# Altium PCB leddriver.PcbDoc
Units mm, origin at the board's own origin, x right, y up, seen from the top; angles counter-clockwise.
Board outline 133.49 x 91.8 mm, 2 copper layers (Top Layer, Bottom Layer), stack 1.58 mm thick; 86 components, 65 nets, 287 pads, 5 vias.
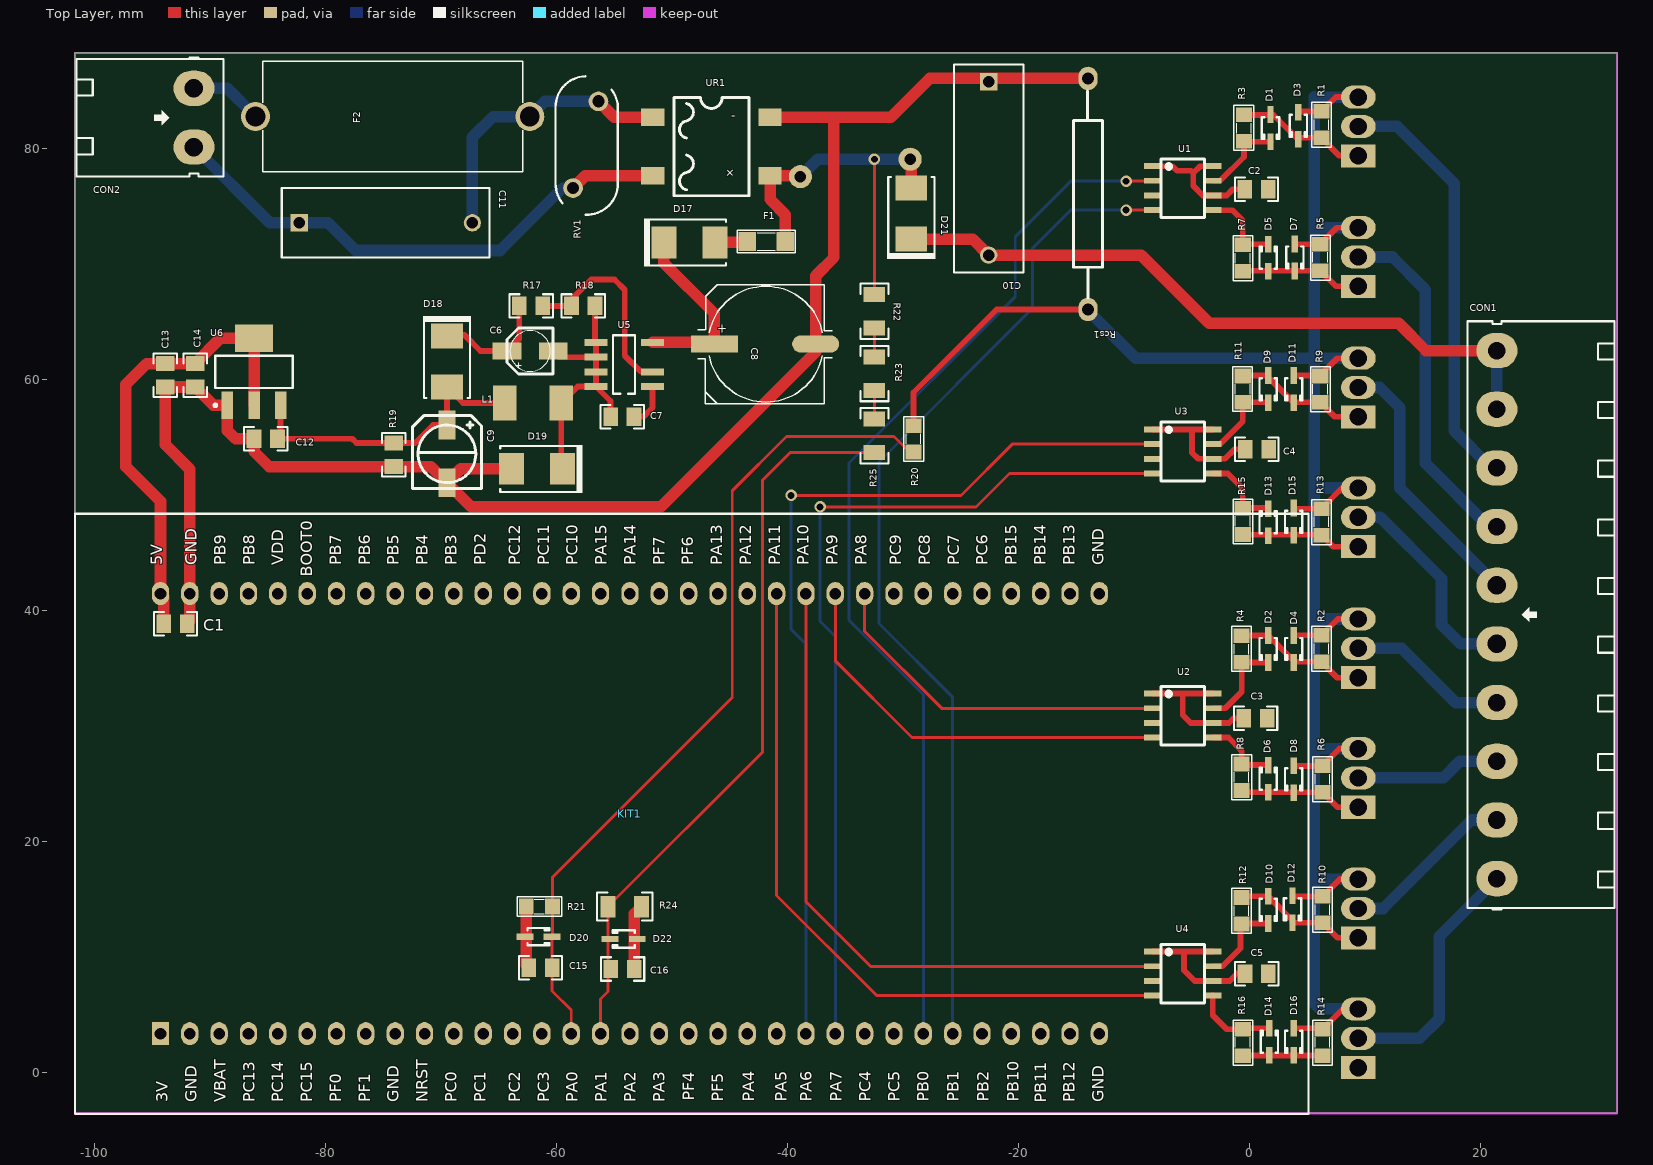
[diagram p0: Top Layer view]
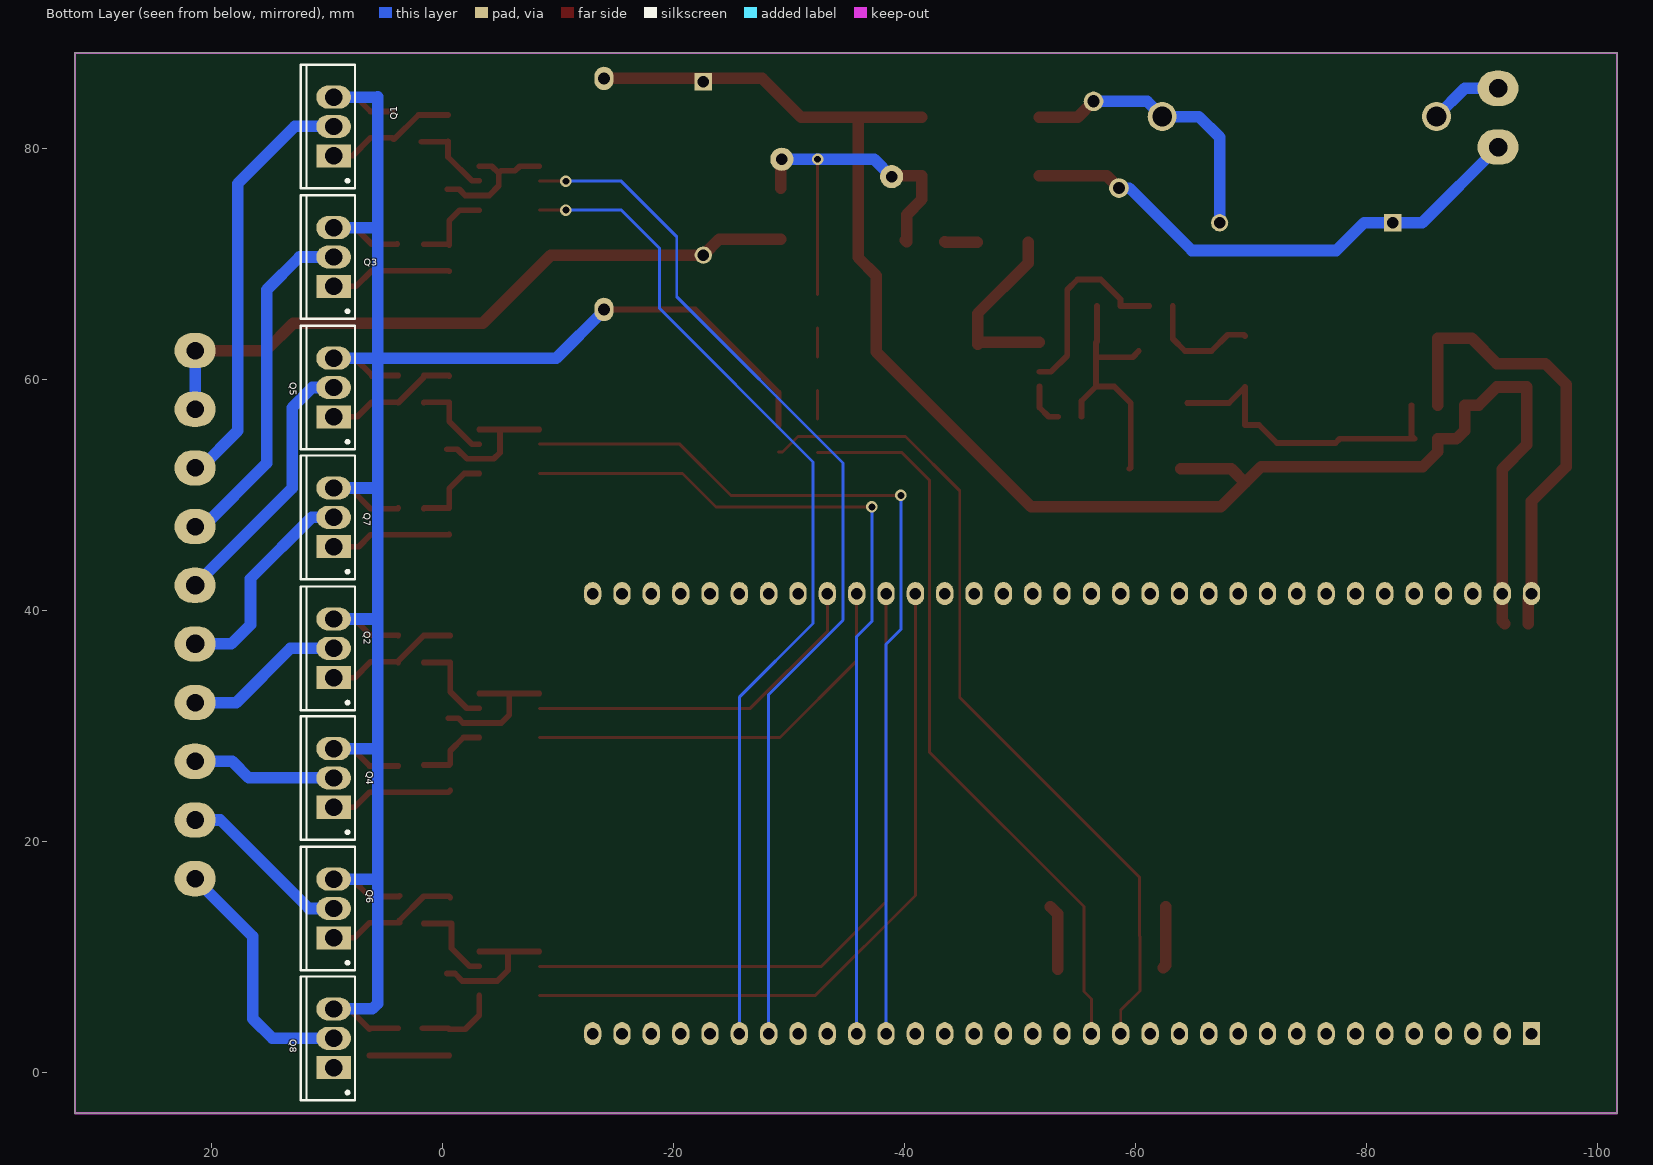
[diagram p1: Bottom Layer view, seen from below]

## Layer stack, top to bottom
Top Solder: solder mask 0.0102, Solder Resist, Dk 3.5
Top Layer: signal copper 0.0356
Dielectric 1: dielectric 1.5086, FR-4, Dk 4.8
Bottom Layer: signal copper 0.0356
Bottom Solder: solder mask 0.0102, Solder Resist, Dk 3.5

## Board outline
-101.7,-3.5 31.794,-3.5 31.794,88.3 -101.7,88.3

## Design rules (kind name [scope] priority, off if disabled: settings)
Clearance Clearance_1 [InNet('GND')] p1: gap=0.254
Clearance cutout [IsRegion] p2: gap=0.2
Clearance keepout [OnLayer('Keep-Out Layer')] p3: gap=0.2
Clearance [All] p4: gap=0.254
HoleSize [All] p1: absolutevalues=TRUE maxlimit=5 minlimit=0.01 maxpercent=80.000 minpercent=20.000
MinimumSolderMaskSliver [All] p1: minsoldermaskwidth=0.01
PolygonConnect [All] p1: connectstyle=Direct reliefconductorwidth=0.254 reliefentries=4 polygonreliefangle="90 Angle" airgapwidth=0.254
RoutingVias [All] p1: holewidth=0.3 width=0.6 viastyle="Through Hole" minholewidth=0.3 minwidth=0.6 maxholewidth=5 maxwidth=5
SilkToSilkClearance [All] p1: silktosilkclearance=0.1
SilkToSolderMaskClearance [IsPad] p1: minsilkscreentomaskgap=0.01 clearancetoexposedcopper=TRUE
SolderMaskExpansion [All] p1: expansion=0.102
Width [All] p1: maxlimit=5 minlimit=0.254 preferedwidth=0.254
26 further rules are at their usual default settings.

## Components (designator, comment, footprint, x,y, rotation, side; value= is the part's Value field where it differs from the comment)
C1 "104" 0805_HV -93,38.9 r180 top
C2 "104" 0805_HV 0.584,76.5 r180 top
C3 "104" 0805_HV 0.5,30.7 r180 top
C4 "104" 0805_HV 0.616,54 r180 top
C5 "104" 0805_HV 0.6,8.6 r180 top
C6 "10uF" TU_NHOM_10uF_MH -62.3,62.5 r270 top
C7 "104" 0805_HV -54.316,56.8 r0 top
C8 "400AX6R8M8x11" CAP-PANACAP-G-GENERIC -41.9,63.1 r0 top
C9 "220uF" TU_NHOM_2.5_MH -69.5,53.6 r0 top
C10 "B32922C3334M189" B32922_12mm -22.6,78.3 r270 top
C11 "B32922C3334M189" B32922_12mm -74.8,73.6 r0 top
C12 "105" 0805_HV -85.184,54.9 r0 top
C13 "105" 0805_HV -93.9,60.4 r90 top
C14 "105" 0805_HV -91.3,60.4 r90 top
C15 "104" 0805_HV -61.4,9.1 r0 top
C16 "104" 0805_HV -54.3,9 r180 top
CON1 "CON 10 EDG 5.08_MH" "Con 10 EDG 5.08" 21.4,39.68 r90 top
CON2 "CON 2 EDG 5.08_MH" "CON 2 EDG 5.08" -91.4,82.7 r270 top
D1 "BAT54HT1G" SOD-323 1.8,81.8 r90 top
D2 "BAT54HT1G" SOD-323 1.6,36.7 r90 top
D3 "15V" SOD-323 4.2,82 r90 top
D4 "15V" SOD-323 3.8,36.7 r90 top
D5 "BAT54HT1G" SOD-323 1.6,70.575 r270 top
D6 "BAT54HT1G" SOD-323 1.6,25.475 r270 top
D7 "15V" SOD-323 3.9,70.6 r90 top
D8 "15V" SOD-323 3.8,25.425 r90 top
D9 "BAT54HT1G" SOD-323 1.6,59.2 r90 top
D10 "BAT54HT1G" SOD-323 1.6,14.125 r90 top
D11 "15V" SOD-323 3.8,59.2 r90 top
D12 "15V" SOD-323 3.7,14.175 r90 top
D13 "BAT54HT1G" SOD-323 1.6,47.675 r270 top
D14 "BAT54HT1G" SOD-323 1.7,2.7 r270 top
D15 "15V" SOD-323 3.8,47.725 r90 top
D16 "15V" SOD-323 3.8,2.7 r90 top
D17 "US1M-13-F" SMB -48.51,71.9 r180 top
D18 "US1M-13-F" SMB -69.5,61.59 r90 top
D19 "US1M-13-F" SMB -61.71,52.3 r0 top
D20 "3.3V" SOD-323 -61.575,11.8 r180 top
D21 "US1M-13-F" SMB -29.3,74.4 r270 top
D22 "3.3V" SOD-323 -54.2,11.6 r0 top
F1 "FUSE_AUTO_0.5A 8V 1206_MH" "FUSE 1206" -41.8,72 r180 top
F2 "37015000430" "Fuse 5x20" -74.2,82.8 r180 top
KIT1 "STM32discovery" STM32discovery_kit -53.66,22.45 r0 top locked
L1 "680uF" "Inductor 4.5x5" -61.8,58.1 r0 top
Q1 "IPA60R330P" TO-220AB_NH 9.4,81.94 r90 bottom
Q2 "IPA60R330P" TO-220AB_NH 9.4,36.76 r90 bottom
Q3 "IPA60R330P" TO-220AB_NH 9.4,70.64 r90 bottom
Q4 "IPA60R330P" TO-220AB_NH 9.4,25.54 r90 bottom
Q5 "IPA60R330P" TO-220AB_NH 9.4,59.34 r90 bottom
Q6 "IPA60R330P" TO-220AB_NH 9.4,14.24 r90 bottom
Q7 "IPA60R330P" TO-220AB_NH 9.4,48.1 r90 bottom
Q8 "IPA60R330P" TO-220AB_NH 9.4,3 r90 bottom
R1 "10k" "Tro SMD 0805" 6.2,82.1 r90 top
R2 "10k" "Tro SMD 0805" 6.2,36.743 r90 top
R3 "10" "Tro SMD 0805" -0.5,81.8 r270 top
R4 "10" "Tro SMD 0805" -0.7,36.7 r270 top
R5 "10k" "Tro SMD 0805" 6.1,70.6 r90 top
R6 "10k" "Tro SMD 0805" 6.3,25.443 r90 top
R7 "10" "Tro SMD 0805" -0.6,70.543 r90 top
R8 "10" "Tro SMD 0805" -0.7,25.6 r90 top
R9 "10k" "Tro SMD 0805" 6.1,59.2 r90 top
R10 "10k" "Tro SMD 0805" 6.3,14.143 r90 top
R11 "10" "Tro SMD 0805" -0.6,59.2 r270 top
R12 "10" "Tro SMD 0805" -0.7,14.043 r270 top
R13 "10k" "Tro SMD 0805" 6.2,47.7 r90 top
R14 "10k" "Tro SMD 0805" 6.3,2.643 r90 top
R15 "10" "Tro SMD 0805" -0.6,47.757 r90 top
R16 "10" "Tro SMD 0805" -0.6,2.643 r90 top
R17 "13k" 0805_HV -62.216,66.4 r180 top
R18 "2K" 0805_HV -57.7,66.4 r180 top
R19 "3k3" 0805_HV -74.1,53.516 r90 top
R20 "10k" "Tro SMD 0805" -29.1,54.9 r90 top
R21 "100k" "Tro SMD 0805" -61.5,14.4 r180 top
R22 "1M" 1206 -32.5,65.95 r270 top
R23 "100K" 1206 -32.5,60.55 r90 top
R24 "100K" 1206 -54.1,14.4 r180 top
R25 "1M" 1206 -32.5,55.15 r270 top
Rcs1 "10R" TRO_VACH_2W -14,76.1 r270 top
RV1 "S10K275E2" VAR_S10K275E2 -57.4,80.3 r270 top
U1 "PM8834TR" "SOP 8" -5.8,76.6 r270 top
U2 "PM8834TR" "SOP 8" -5.804,30.935 r270 top
U3 "PM8834TR" "SOP 8" -5.8,53.8 r270 top
U4 "PM8834TR" "SOP 8" -5.8,8.6 r270 top
U5 "LNK306" "SOP 7" -51.7,59.43 r180 top
U6 "AMS1117-3.3V SOT223 _MH" SOT223 -86.2,60.7 r0 top
UR1 "DB207S" DB207S -46.6,80.2 r270 top

## Footprints (in the part's own frame and the unit in brackets; to place one, negate y for a bottom-side part, rotate by r counter-clockwise, add the part's x,y. Pads: shape width x height; smd on the part's side, far side on the other; paste and mask are expansions set on the pad)
0805_HV [mil] "0805 with 30mil clearance between pads"
  rect 50x63 smd: 1(-40,0) 2(40,0)
  silkscreen extent -74,-40 74,40, body extent -43,-29 43,29, height 57
1206 [mm] "1206 from SM-752 data"
  rect 1.3x1.85 smd: 1(1.45,0) 2(-1.45,0)
  silkscreen extent -2.4,-1.21 2.4,1.21, body extent -1.7,-0.9 1.7,0.9, height 1.35
B32922_12mm [mm] "Epcos film capacitors, 15mm spacing"
  rect 1.5x1.5 hole 0.991: 1(-7.5,0)
  round 1.5 hole 0.991: 2(7.5,0)
  silkscreen extent -9,-3 9,3, body extent -9,-3 9,3, height 12
CAP-PANACAP-G-GENERIC [mil]
  rect 160x59.06 smd: 1(-175,0)
  oval 160x59.06 smd: 2(170,0)
  silkscreen extent -231,-203 227,203, body extent -233,-203 223,203, height 402
"CON 2 EDG 5.08" [mil]
  oval 120x140 hole 62.99: 1(-100,0) 2(100,0)
  silkscreen extent -205,-400 200,100, body extent -197,-399 197,73, height 334
"Con 10 EDG 5.08" [mil]
  oval 120x140 hole 60: 1(-900,0) 2(-700,0) 3(-500,0) 4(-300,0) 7(300,0) 8(500,0) 9(700,0) 10(900,0)
  oval 120x140 hole 62.99: 5(-100,0) 6(100,0)
  silkscreen extent -1005,-400 1000,100, body extent -996,-402 997,70, height 334
DB207S [mm]
  rect 1.5x2 smd: 1(-2.54,-5.08) 2(2.54,-5.08) 3(2.54,5.08) 4(-2.54,5.08)
  silkscreen extent -4.25,-3.25 4.26,3.25, body extent -4.4,-4.98 4.4,4.98, height 3.02
"Fuse 5x20" [mm] "Epcos film capacitors, 15mm spacing"
  round 2.5 hole 1.7: 1(-11.875,0) 2(11.875,0)
  silkscreen extent -11.25,-4.8 11.25,4.8, body extent -12.14,-4.46 12.11,4.54, height 13.94
"FUSE 1206" [mil]
  rect 60x65 smd: 1(-63,0.94) 2(67,0.94)
  silkscreen extent -97,-37 101,40, body extent -63,-33 63,33, height 22
"Inductor 4.5x5" [mm]
  rect 2x3 smd: 1(2.2,-0.1) 2(-2.7,-0.1)
  body extent -2.6,-2.6 2.2,2.2, height 2
SMB [mm] "Molded Diode, 2-Leads, Body 5.4x3.6mm, IPC Medium Density, based on OnSemi component dimensions"
  rect 2.159x2.743 smd: 1(2.21,0) 2(-2.21,0)
  silkscreen extent -3.18,-2.08 3.94,2.08, body extent -2.7,-1.8 2.7,1.8, height 2.32
SOD-323 [mm] "SOD-323/SC-76; 2 Leads; Body 1.7 x 1.3 mm, (LxW)"
  rect 1.45x0.55 smd: 1(-1.175,0) 2(1.175,0)
  silkscreen extent -0.95,-0.75 0.95,0.75
"SOP 7" [mm]
  rect 2x0.6 smd: 1(0,0) 2(0,-1.27) 4(0,-3.81) 5(4.9,-3.81) 6(4.9,-2.54) 7(4.9,-1.27) 8(4.9,0)
  silkscreen extent 1.52,-4.44 3.43,0.64, body extent -0.66,-4.38 5.39,0.52, height 1.36
"SOP 8" [mil] "LQFP64"
  rect 20x60 smd: 1(-75,-102.5) 2(-25,-102.5) 3(25,-102.5) 4(75,-102.5) 5(75,102.5) 6(25,102.5) 7(-25,102.5) 8(-75,102.5)
  silkscreen extent -100,-75 100,75, body extent -98,-120 100,117, height 63
SOT223 [mm]
  rect 1x2.4 smd: 1(-2.3,-2.9) 2(0,-2.9) 3(2.3,-2.9)
  rect 3.3x2.4 smd: 4(0,2.9)
  silkscreen extent -3.47,-3.02 3.35,1.4, body extent -3.25,-3.56 3.25,3.4, height 1.68
STM32discovery_kit [mm]
  rect 1.5x2 hole 1 paste+0: 1(-40.64,-19.05)
  oval 1.5x2 hole 1 paste+0: 2(-38.1,-19.05) 3(-35.56,-19.05) 4(-33.02,-19.05) 5(-30.48,-19.05) 6(-27.94,-19.05) 7(-25.4,-19.05) 8(-22.86,-19.05) 9(-20.32,-19.05) 10(-17.78,-19.05) 11(-15.24,-19.05) 12(-12.7,-19.05) 13(-10.16,-19.05) 14(-7.62,-19.05) 15(-5.08,-19.05) 16(-2.54,-19.05) 17(0,-19.05) 18(2.54,-19.05) 19(5.08,-19.05) 20(7.62,-19.05) 21(10.16,-19.05) 22(12.7,-19.05) 23(15.24,-19.05) 24(17.78,-19.05) 25(20.32,-19.05) 26(22.86,-19.05) 27(25.4,-19.05) 28(27.94,-19.05) 29(30.48,-19.05) 30(33.02,-19.05) 31(35.56,-19.05) 32(38.1,-19.05) 33(40.64,-19.05) 34(40.64,19.05) 35(38.1,19.05) 36(35.56,19.05) 37(33.02,19.05) 38(30.48,19.05) 39(27.94,19.05) 40(25.4,19.05) 41(22.86,19.05) 42(20.32,19.05) 43(17.78,19.05) 44(15.24,19.05) 45(12.7,19.05) 46(10.16,19.05) 47(7.62,19.05) 48(5.08,19.05) 49(2.54,19.05) 50(0,19.05) 51(-2.54,19.05) 52(-5.08,19.05) 53(-7.62,19.05) 54(-10.16,19.05) 55(-12.7,19.05) 56(-15.24,19.05) 57(-17.78,19.05) 58(-20.32,19.05) 59(-22.86,19.05) 60(-25.4,19.05) 61(-27.94,19.05) 62(-30.48,19.05) 63(-33.02,19.05) 64(-35.56,19.05) 65(-38.1,19.05) 66(-40.64,19.05)
  silkscreen extent -48.04,-26 58.74,25.95
TO-220AB_NH [mm] "TO, Thru-Hole, Vertical, Heatsink Mounted; 3 In-Line Leads; Pitch 2.54 mm"
  rect 2x3 hole 1.5 paste+0: 1(-2.54,0)
  oval 2x3 hole 1.5 paste+0: 2(0,0) 3(2.54,0)
  silkscreen extent -5.35,-1.85 5.35,2.85, body extent -5.08,-1.57 5.08,3, height 20.54
"Tro SMD 0805" [mil]
  rect 50x55 smd: 1(-45,0) 2(45,0)
  silkscreen extent -77,-34 76,33, body extent -62,-28 56,27, height 21
TRO_VACH_2W [mil]
  oval 80x65 hole 40: 1(-393.7,0) 2(393.7,0)
  silkscreen extent -351,-50 354,50, body extent -414,-110 414,107, height 217
TU_NHOM_2.5_MH [mm]
  rect 1.5x2.5 smd: 1(0,2.5) 2(0,-2.5)
  silkscreen extent -3,-3 3,3.3, body extent -3.3,-3.5 3.3,3.5, height 8.11
TU_NHOM_10uF_MH [mm]
  rect 1.5x2.5 smd: 1(0,-2) 2(0,2)
  silkscreen extent -2,-2 2,2, body extent -2.15,-2.5 2.15,2.5, height 5.4
VAR_S10K275E2 [mm] "EPCOS"
  round 1.7 hole 1.067: 1(-3.81,1.016) 2(3.69,-1.184)
  silkscreen extent -6,-2.7 6,2.7, body extent -5.98,-2.7 5.98,2.7, height 14.99

## Part data
C1 C2 C3 C4 C5 C7 C12 C13 C14 C15 C16: library part CM, "Cap SMD"
C6: library part TU_NHOM_10uF_25V_MH, "TU_NHOM_10uF_25V_MH"
C8: "CAP, AL, 6.8uF, 400V, +/-20%, TH"
C9: library part TU_NHOM_220uF_25V_MH, "TU_NHOM_220uF_25V_MH"
C10 C11: library part BFC233620154, "CAP FILM 0.33UF 630VDC RADIAL"
CON1: "CON 10 EDG 5.08 (xanh cong)"
CON2: "CON 2 EDG 5.08 (xanh cong)"
D1 D2 D3 D4 D5 D6 D7 D8 D9 D10 D11 D12 D13 D14 D15 D16 D20 D22: library part MMDL914-TP, "Diode, Switching, 100 V, 0.2 A, SOD-323"
D17 D18 D19 D21: library part MURS160-13-F, "Diode, Ultrafast, 600V, 1A, SMB"
F1: "Fuse"
F2: library part 0216008.MXESPP, "FUSE BOARD MOUNT 5A 250VAC RAD"
KIT1: library part STM32Discovery_kit
L1: library part "Inductor 4.5x5_MH"
Q1 Q2 Q3 Q4 Q5 Q6 Q7 Q8: library part IPP60R190P6, "MOSFET N-CH 600V 10.6A TO220"
R1 R2 R3 R4 R5 R6 R7 R8 R9 R10 R11 R12 R13 R14 R15 R16 R20 R21 R22 R23 R24 R25: library part "R nho", "RES, 100, 1%, 0.1 W, 0402"
R17 R18 R19: library part R, "Resistor 1/4W"
Rcs1: library part TRO_CS_2W_MH
RV1: "Varistor 275V RMS 10MM Radial, TH"
U5: library part Component_1

## Free pads (board coordinates)
  round 2 hole 1 paste+0: 1(-38.9,77.6) 2(-29.4,79.1)

## Via types
v1: diameter 1, hole 0.6, Top Layer to Bottom Layer, tented both sides, 5 vias

## Nets (pads, with @x,y where several pads share a name; then routed paths per layer and width w, separated by ;. In a path a pad name is that pad's centre, name@x,y a point inside that pad or via, vN(x,y) a via of type N, cw(c..) or ccw(c..) an arc to the next point about the centre after c; other vN are vias at no path point)
3V: KIT1.1
5V: C1.2 C13.2 C14.2 KIT1.66 U6.2 U6.4 | length 40.6
  Top Layer w1: C1.2 -94.016,41.216 KIT1.66 -94.3,49.5 -97.3,52.5 -97.3,59.6 -95.484,61.416 C13.2 C14.2 -89.116,63.6 U6.4 U6.2
12V: C2.2 C3.2 C4.2 C5.2 C9.1 C12.2 D18.2 L1.2 R19.2 U1.1 U1.6 U1.8 U2.1 U2.6 U2.8 U3.1 U3.6 U3.8 U4.1 U4.6 U4.8 U6.3 | length 77.1
  Top Layer w0.5: U6.3 -83.9,55.168 C12.2 -77.7,54.9 -77.332,54.532 R19.2 -72.268,54.532 -70.7,56.1 C9.1 D18.2 -68.12,58 L1.2 ; U2.1 -5.8,32.84 ; U4.1 -5.7,10.505 ; U3.1 U3.8 ; U1.1 -6.705,78.505 -6.3,78.1 -5.1,78.1 -4.9,77.9 ; -5,55.7 -5,53.7 -4.465,53.165 U3.6 -2.135,53.165 -1.3,54 C4.2 ; U2.8 -5.8,32.84 ; U4.8 -5.7,10.505 ; U1.8 -4.295,78.505 -4.9,77.9 ; C3.2 -1.4,30.7 -1.8,30.3 U2.6 -5.1,30.3 -5.8,31 -5.8,32.84 ; C2.2 -1.465,76.5 -2,75.965 U1.6 -4.065,75.965 -4.9,76.8 -4.9,77.9 ; C5.2 -1.1,8.6 -1.735,7.965 U4.6 -4.765,7.965 -5.7,8.9 -5.7,10.505
+VDC: C10.2 CON1.9 CON1.10 D21.1 | length 59.8
  Top Layer w1: D21.1 -23.99,72.19 C10.2 -9.4,70.8 -3.5,64.9 12.9,64.9 15.26,62.54 CON1.10
  Bottom Layer w1: CON1.9 CON1.10
+VDC1: C8.1 D17.1 U5.4 | length 16
  Top Layer w1: U5.4 -46.485,63.24 C8.1 -46.345,65.745 -50.72,70.12 D17.1
BP: C7.2 U5.1 | length 3.8
  Top Layer w0.5: C7.2 -52.5,56.8 -51.7,57.6 U5.1
CS: D3.2 D4.2 D7.2 D8.2 D11.2 D12.2 D15.2 D16.2 Q1.3 Q2.3 Q3.3 Q4.3 Q5.3 Q6.3 Q7.3 Q8.3 R1.2 R2.2 R5.2 R6.2 R9.2 R10.2 R13.2 R14.2 R20.2 Rcs1.2 | length 201.3
  Top Layer w0.5: R20.2 -29.1,58.9 -21.9,66.1 Rcs1.2 ; D12.2 3.764,15.286 R10.2 7.794,16.78 Q6.3 ; D16.2 6.211,3.875 R14.2 8.054,5.54 Q8.3 ; D8.2 3.814,26.586 R6.2 7.794,28.08 Q4.3 ; D4.2 3.811,37.886 R2.2 7.614,39.3 Q2.3 ; D15.2 3.857,48.843 R13.2 7.997,50.64 Q7.3 ; D11.2 R9.2@6.068,60.375 ; D7.2 3.932,71.743 R5.2 7.537,73.18 Q3.3 ; D3.2 4.268,83.243 R1.2 7.437,84.48 Q1.3 ; R9.2 R9.2@6.068,60.375 ; Q5.3 7.573,61.88 R9.2@6.068,60.375
  Bottom Layer w1: Rcs1.2 -14,66 -9.88,61.88 5.6,61.88 ; Q8.3 6.06,5.54 5.6,6 5.6,16.9 ; Q6.3 5.72,16.78 5.6,16.9 ; Q4.3 5.72,28.08 5.6,28.2 ; Q2.3 5.7,39.3 5.6,39.4 ; Q7.3 5.64,50.64 5.6,50.6 ; Q5.3 5.6,61.88 ; Q3.3 5.82,73.18 5.6,73.4 ; Q1.3 5.62,84.48 5.6,84.5 5.6,73.4 ; 5.6,16.9 5.6,28.2 ; 5.6,28.2 5.6,39.4 ; 5.6,39.4 5.6,50.6 ; 5.6,50.6 5.6,61.88 ; 5.6,61.88 5.6,73.4
FB: R17.1 R18.2 U5.2 | length 17.4
  Top Layer w0.5: R17.1 R18.2 -58.716,66.984 -57,68.7 -55,68.7 -54.1,67.8 -54.1,62.1 -52.7,60.7 U5.2
GND: C1.1 C2.1 C3.1 C4.1 C5.1 C8.2 C9.2 C10.1 C12.1 C13.1 C14.1 C15.1 C16.1 D19.2 D20.2 D22.2 KIT1.65 R19.1 R21.2 R24.2 Rcs1.1 U1.3 U2.3 U3.3 U4.3 U6.1 UR1.4 | length 156.7
  Top Layer w1: C1.1 -91.76,39.124 KIT1.65 -91.76,52.26 -93.9,54.4 C13.1 C14.1 -89.716,57.8 U6.1 -88.5,55.6 -87.8,54.9 C12.1 -86.2,53.8 -84.9,52.5 R19.1 -70.9,52.5 C9.2 ; D19.2 -68.3,52.3 C9.2 ; R21.2 -62.643,9.327 C15.1 ; C16.1 -53.284,13.766 R24.2 ; UR1.4 -36,82.74 ; Rcs1.1 -27.7,86.1 -31.06,82.74 -36,82.74 ; C9.2 -67.4,49 -51,49 -37.582,62.418 C8.2 -37.582,69.018 -36,70.6 -36,82.74
  Bottom Layer w1: Rcs1.1@-14.1,86 Rcs1.1
HV1: D21.2 F1.1 pad.1 pad.2 R22.2 UR1.3 | length 33.4
  Top Layer w0.254: R22.2 v1(-32.5,79.1)
  Top Layer w1: F1.1@-40.076,72.1 F1.1 -40.2,74.3 -41.52,75.62 UR1.3 -38.96,77.66 pad.1 ; pad.2 -29.3,79 D21.2
  Bottom Layer w1: pad.1 -37.4,79.1 v1(-32.5,79.1) pad.2
IN0: C15.2 D20.1 KIT1.15 R20.1 R21.1 | length 72.4
  Top Layer w0.254: KIT1.15 -58.74,5.44 -60.4,7.1 D20.1 -60.357,11.843 R21.1 -60.357,16.943 -44.8,32.5 -44.8,50.4 -40.1,55.1 -30.8,55.1 -29.457,53.757 R20.1
IN1: C16.2 D22.1 KIT1.16 R24.1 R25.1 | length 64.4
  Top Layer w0.254: KIT1.16 -56.2,6.4 -55.55,7.05 -55.55,11.6 R24.1 -42.2,27.75 -42.2,51.3 -39.8,53.7 R25.1
LED_STR1: CON1.8 Q1.2 | length 36.8
  Bottom Layer w1: Q1.2 12.76,81.94 17.7,77 17.7,55.6 20.92,52.38 CON1.8
LED_STR2: CON1.7 Q3.2 | length 30.5
  Bottom Layer w1: Q3.2 12.36,70.64 15.2,67.8 15.2,52.8 20.7,47.3 CON1.7
LED_STR3: CON1.6 Q5.2 | length 23.2
  Bottom Layer w1: Q5.2 11.26,59.34 13,57.6 13,50.62 CON1.6
LED_STR4: CON1.5 Q7.2 | length 18.9
  Bottom Layer w1: Q7.2 11.3,48.1 16.6,42.8 16.6,38.8 18.26,37.14 CON1.5
LED_STR5: CON1.4 Q2.2 | length 13.9
  Bottom Layer w1: Q2.2 13.14,36.76 17.84,32.06 CON1.4
LED_STR6: CON1.3 Q4.2 | length 12.6
  Bottom Layer w1: Q4.2 16.74,25.54 18.18,26.98 CON1.3
LED_STR7: CON1.2 Q6.2 | length 15.2
  Bottom Layer w1: Q6.2 11.54,14.24 19.2,21.9 CON1.2
LED_STR8: CON1.1 Q8.2 | length 21.9
  Bottom Layer w1: Q8.2 14.7,3 16.4,4.7 16.4,11.82 CON1.1
NetC6_1: C6.1 D18.1 R17.2 | length 10.2
  Top Layer w0.5: D18.1 -69.4,63.9 -68,63.9 -66.6,62.5 C6.1 -63.232,63.568 R17.2
NetC11_1: C11.1 CON2.2 RV1.2 UR1.2 | length 46.1
  Top Layer w1: RV1.2 -57.534,77.66 UR1.2
  Bottom Layer w1: CON2.2 -84.84,73.6 C11.1 -79.8,73.6 -77.4,71.2 -64.9,71.2 -59.49,76.61 RV1.2
NetC11_2: C11.2 F2.1 RV1.1 UR1.1 | length 24.9
  Top Layer w1: RV1.1 -55.014,82.74 UR1.1
  Bottom Layer w1: C11.2 -67.3,81 -65.5,82.8 F2.1 -61.015,84.11 RV1.1
NetCON2_1: CON2.1 F2.2 | length 6.3
  Bottom Layer w1: CON2.1 -88.515,85.24 F2.2
NetD1_1: D1.1 R3.2 U1.7 | length 7.2
  Top Layer w0.5: U1.7 -2.565,77.235 -0.5,79.3 R3.2 -0.468,80.625 D1.1
NetD1_2: D1.2 D3.1 Q1.1 R1.1 R3.1 | length 11.5
  Top Layer w0.5: R3.1 2.057,82.943 4.175,80.825 D3.1 4.332,80.957 R1.1 7.757,79.4 Q1.1
NetD2_1: D2.1 R4.2 U2.7 | length 8
  Top Layer w0.5: U2.7 -2.13,31.57 -0.7,33 R4.2 -0.668,35.525 D2.1
NetD2_2: D2.2 D4.1 Q2.1 R2.1 R4.1 | length 11.8
  Top Layer w0.5: R4.1 -0.668,37.875 D2.2 3.8,35.675 D4.1 3.875,35.6 R2.1 7.58,34.22 Q2.1
NetD5_1: D5.1 R7.2 U1.5 | length 7.3
  Top Layer w0.5: U1.5 -1.495,74.695 -0.6,73.8 R7.2 -0.536,71.75 D5.1
NetD5_2: D5.2 D7.1 Q3.1 R5.1 R7.1 | length 10.6
  Top Layer w0.5: R7.1 -0.543,69.457 3.9,69.457 R5.1 7.457,68.1 Q3.1
NetD6_1: D6.1 R8.2 U2.5 | length 6.5
  Top Layer w0.5: U2.5 -1.83,29.03 -0.7,27.9 R8.2 -0.607,26.65 D6.1
NetD6_2: D6.2 D8.1 Q4.1 R6.1 R8.1 | length 10.7
  Top Layer w0.5: R8.1 -0.543,24.3 D6.2 R6.1 7.6,23 Q4.1
NetD9_1: D9.1 R11.2 U3.7 | length 7.3
  Top Layer w0.5: U3.7 -2.565,54.435 -0.6,56.4 R11.2 1.568,58.057 D9.1
NetD9_2: D9.2 D11.1 Q5.1 R9.1 R11.1 | length 11.6
  Top Layer w0.5: R11.1 -0.568,60.375 D9.2 1.6,60.225 D11.1 3.832,58.057 R9.1 7.357,56.8 Q5.1
NetD10_1: D10.1 R12.2 U4.7 | length 7.7
  Top Layer w0.5: U4.7 -2.365,9.235 -0.8,10.8 R12.2@-0.8,12.95 ; R12.2 -0.75,12.9 R12.2@-0.8,12.95 ; D10.1 R12.2@-0.8,12.95
NetD10_2: D10.2 D12.1 Q6.1 R10.1 R12.1 | length 11.8
  Top Layer w0.5: R12.1 -0.586,15.3 D10.2 3.7,13.2 D12.1 R10.1 7.6,11.7 Q6.1
NetD13_1: D13.1 R15.2 U3.5 | length 7.1
  Top Layer w0.5: U3.5 -1.895,51.895 -0.6,50.6 R15.2 1.55,48.9 D13.1
NetD13_2: D13.2 D15.1 Q7.1 R13.1 R15.1 | length 10.5
  Top Layer w0.5: R15.1 -0.6,46.596 3.8,46.596 R13.1@6.2,46.596 ; R13.1 R13.1@6.2,46.596 ; Q7.1 7.236,45.56 R13.1@6.2,46.596
NetD14_1: D14.1 R16.2 U4.5 | length 7.1
  Top Layer w0.5: U4.5 -3.197,4.997 -1.986,3.786 R16.2 -0.511,3.875 D14.1
NetD14_2: D14.2 D16.1 Q8.1 R14.1 R16.1 | length 6.9
  Top Layer w0.5: R16.1 D14.2@1.675,1.5 ; D14.2 D14.2@1.675,1.5 ; R14.1 D14.2@1.675,1.5
NetD17_2: D17.2 F1.2 | length 2.8
  Top Layer w1: D17.2 -43.578,71.9 F1.2
NetR22_1: R22.1 R23.1 | length 2.5
  Top Layer w0.254: R23.1 R22.1
NetR23_2: R23.2 R25.2 | length 2.5
  Top Layer w0.254: R25.2 R23.2
PA6: KIT1.23 U3.2 | length 80.3
  Top Layer w0.254: v1(-39.7,50) -25,50 -20.565,54.435 U3.2
  Bottom Layer w0.254: v1(-39.7,50) -39.7,38.4 -38.42,37.12 KIT1.23
PA7: KIT1.24 U3.4 | length 76.1
  Top Layer w0.254: v1(-37.2,49) -23.7,49 -20.805,51.895 U3.4
  Bottom Layer w0.254: v1(-37.2,49) -37.2,39.1 -35.88,37.78 KIT1.24
PA8: KIT1.42 U2.2 | length 31
  Top Layer w0.254: KIT1.42 -33.34,38.24 -26.67,31.57 U2.2
PA9: KIT1.43 U2.4 | length 36
  Top Layer w0.254: KIT1.43 -35.88,35.68 -29.23,29.03 U2.4
PA10: KIT1.44 U4.2 | length 59
  Top Layer w0.254: KIT1.44 -38.4,41.48 -38.4,14.8 -32.835,9.235 U4.2
PA11: KIT1.45 U4.4 | length 62.3
  Top Layer w0.254: KIT1.45 -40.96,15.36 -32.295,6.695 U4.4
PB0: KIT1.27 U1.2 | length 91.5
  Top Layer w0.254: v1(-10.7,77.2) -10.665,77.235 U1.2
  Bottom Layer w0.254: KIT1.27 -28.26,32.76 -34.7,39.2 -34.7,52.8 -20.3,67.2 -20.3,72.4 -15.5,77.2 v1(-10.7,77.2)
PB1: KIT1.28 U1.4 | length 87.9
  Top Layer w0.254: v1(-10.7,74.7) -10.695,74.695 U1.4
  Bottom Layer w0.254: KIT1.28 -25.72,32.52 -32.1,38.9 -32.1,52.9 -18.8,66.2 -18.8,71.4 -15.5,74.7 v1(-10.7,74.7)
PB3: KIT1.56
PB8: KIT1.63
PB9: KIT1.64
PB13: KIT1.35
PB14: KIT1.36
PB15: KIT1.37
PC13O: KIT1.4
PC14O: KIT1.5
PC15O: KIT1.6
PF0O: KIT1.7
PF1O: KIT1.8
PF4O: KIT1.19
PF5O: KIT1.20
S: C6.2 C7.1 D19.1 L1.1 R18.1 U5.5 U5.6 U5.7 U5.8 | length 23.4
  Top Layer w0.5: C6.2 -59.77,61.97 U5.6 ; D19.1 -59.6,52.4 L1.1 -58.17,59.43 U5.8 ; R18.1 -56.684,63.324 U5.5 U5.6 ; C7.1 -55.332,58.162 U5.8 ; U5.8 U5.7 U5.6
pads on no net: KIT1.2 KIT1.3 KIT1.9 KIT1.10 KIT1.11 KIT1.12 KIT1.13 KIT1.14 KIT1.17 KIT1.18 KIT1.21 KIT1.22 KIT1.25 KIT1.26 KIT1.29 KIT1.30 KIT1.31 KIT1.32 KIT1.33 KIT1.34 KIT1.38 KIT1.39 KIT1.40 KIT1.41 KIT1.46 KIT1.47 KIT1.48 KIT1.49 KIT1.50 KIT1.51 KIT1.52 KIT1.53 KIT1.54 KIT1.55 KIT1.57 KIT1.58 KIT1.59 KIT1.60 KIT1.61 KIT1.62

## Keep-outs
Keep-Out Layer:
  the board outline again, w0.203

## Silkscreen, mask and mechanical layers (free items; w line width, h text height)
Top Overlay:
  text "PB2" at -22.6,-2.5 h1 r90
  text "PB10" at -20,-2.5 h1 r90

## Text inside footprints (layer, text, board x,y; h text height)
C8: Top Overlay "+" at -46.1,64.075 h0.76
KIT1: Top Overlay "PA8" at -33.16,43.95 h1 r90; Top Overlay "PA9" at -35.66,43.95 h1 r90; Top Overlay "GND" at -91.16,43.95 h1 r90; Top Overlay "5V" at -94.16,43.95 h1 r90; Top Overlay "PB9" at -88.66,43.95 h1 r90; Top Overlay "PB8" at -86.16,43.95 h1 r90; Top Overlay "VDD" at -83.66,43.95 h1 r90; Top Overlay "BOOT0" at -81.16,42.95 h1 r90; Top Overlay "PB7" at -78.66,43.95 h1 r90; Top Overlay "PB6" at -76.16,43.95 h1 r90; Top Overlay "PB5" at -73.66,43.95 h1 r90; Top Overlay "PB4" at -71.16,43.95 h1 r90; Top Overlay "PB3" at -68.66,43.95 h1 r90; Top Overlay "PD2" at -66.16,43.95 h1 r90; Top Overlay "PC12" at -63.16,43.95 h1 r90; Top Overlay "PC11" at -60.66,43.95 h1 r90; Top Overlay "PC10" at -58.16,43.95 h1 r90; Top Overlay "PF7" at -50.66,43.95 h1 r90; Top Overlay "PF6" at -48.16,43.95 h1 r90; Top Overlay "PA13" at -45.66,43.95 h1 r90; Top Overlay "PA12" at -43.16,43.95 h1 r90; Top Overlay "PB15" at -20.16,43.95 h1 r90; Top Overlay "PB14" at -17.66,43.95 h1 r90; Top Overlay "PB13" at -15.16,43.95 h1 r90; Top Overlay "GND" at -12.66,-2.55 h1 r90; Top Overlay "PB12" at -15.16,-2.55 h1 r90; Top Overlay "PB11" at -17.6,-2.6 h1 r90; Top Overlay "PB1" at -25.2,-2.5 h1 r90; Top Overlay "PB0" at -27.8,-2.5 h1 r90; Top Overlay "PC5" at -30.3,-2.5 h1 r90; Top Overlay "PC4" at -32.8,-2.5 h1 r90; Top Overlay "3V" at -93.66,-2.55 h1 r90; Top Overlay "GND" at -91.16,-2.55 h1 r90; Top Overlay "VBAT" at -88.66,-2.55 h1 r90; Top Overlay "PC13" at -86.16,-2.55 h1 r90; Top Overlay "PC14" at -83.66,-2.55 h1 r90; Top Overlay "PC15" at -81.16,-2.55 h1 r90; Top Overlay "PF0" at -78.66,-2.55 h1 r90; Top Overlay "PF1" at -76.16,-2.55 h1 r90; Top Overlay "GND" at -73.66,-2.55 h1 r90; Top Overlay "NRST" at -71.16,-2.55 h1 r90; Top Overlay "PC0" at -68.66,-2.55 h1 r90; Top Overlay "PC1" at -66.16,-2.55 h1 r90; Top Overlay "PC2" at -63.16,-2.55 h1 r90; Top Overlay "PC3" at -60.66,-2.55 h1 r90; Top Overlay "PA0" at -58.16,-2.55 h1 r90; Top Overlay "PA1" at -55.66,-2.55 h1 r90; Top Overlay "PA2" at -53.16,-2.55 h1 r90; Top Overlay "PA3" at -50.66,-2.55 h1 r90; Top Overlay "PF4" at -48.1,-2.4 h1 r90; Top Overlay "PF5" at -45.6,-2.5 h1 r90; Top Overlay "PA4" at -42.9,-2.5 h1 r90; Top Overlay "PA5" at -40.1,-2.5 h1 r90; Top Overlay "PA6" at -37.9,-2.5 h1 r90; Top Overlay "PA7" at -35.3,-2.5 h1 r90; Top Overlay "GND" at -12.66,43.95 h1 r90; Top Overlay "PC6" at -22.66,43.95 h1 r90; Top Overlay "PC7" at -25.16,43.95 h1 r90; Top Overlay "PC8" at -27.66,43.95 h1 r90; Top Overlay "PC9" at -30.16,43.95 h1 r90; Top Overlay "PA10" at -38.16,43.95 h1 r90; Top Overlay "PA11" at -40.66,43.95 h1 r90; Top Overlay "PA14" at -53.16,43.95 h1 r90; Top Overlay "PA15" at -55.66,43.95 h1 r90
UR1: Top Overlay "+" at -45.548,77.963 h0.76 r315; Top Overlay "-" at -44.883,82.522 h0.76